# Altium PCB BMS.PcbDoc
Units mm, origin at the board's own origin, x right, y up, seen from the top; angles counter-clockwise.
Board outline 112.5 x 100 mm, 2 copper layers (Top Layer, Bottom Layer), stack 1.671 mm thick; 67 components, 54 nets, 239 pads, 0 vias.
Unrouted connection lines stored in the file: 137.
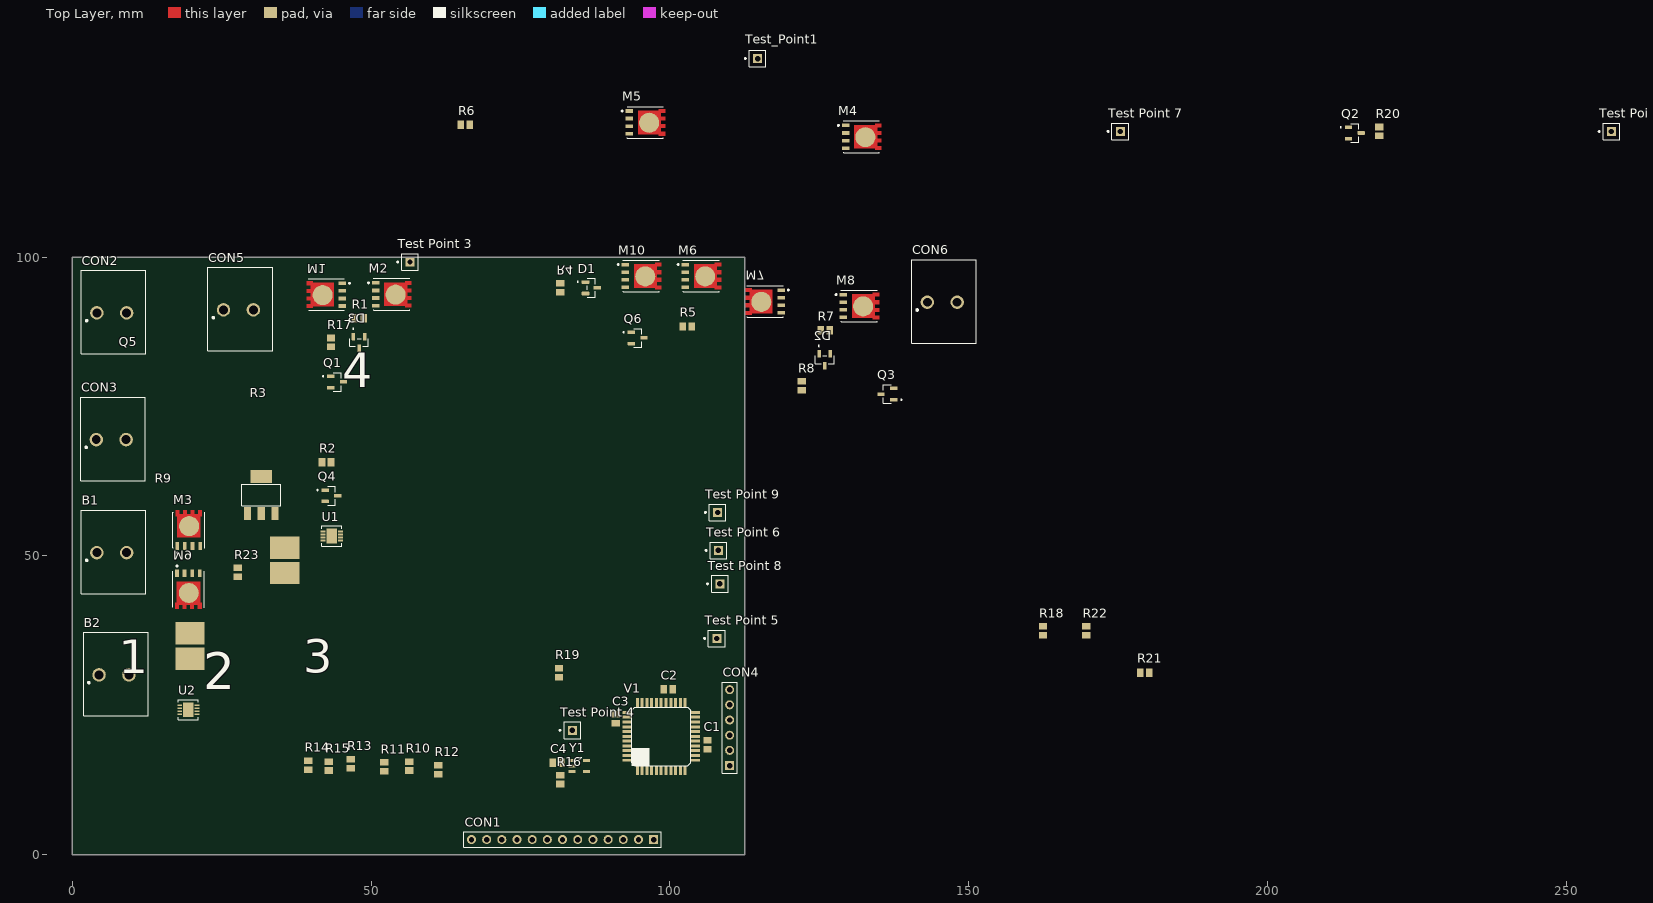
[diagram p0: Top Layer view]
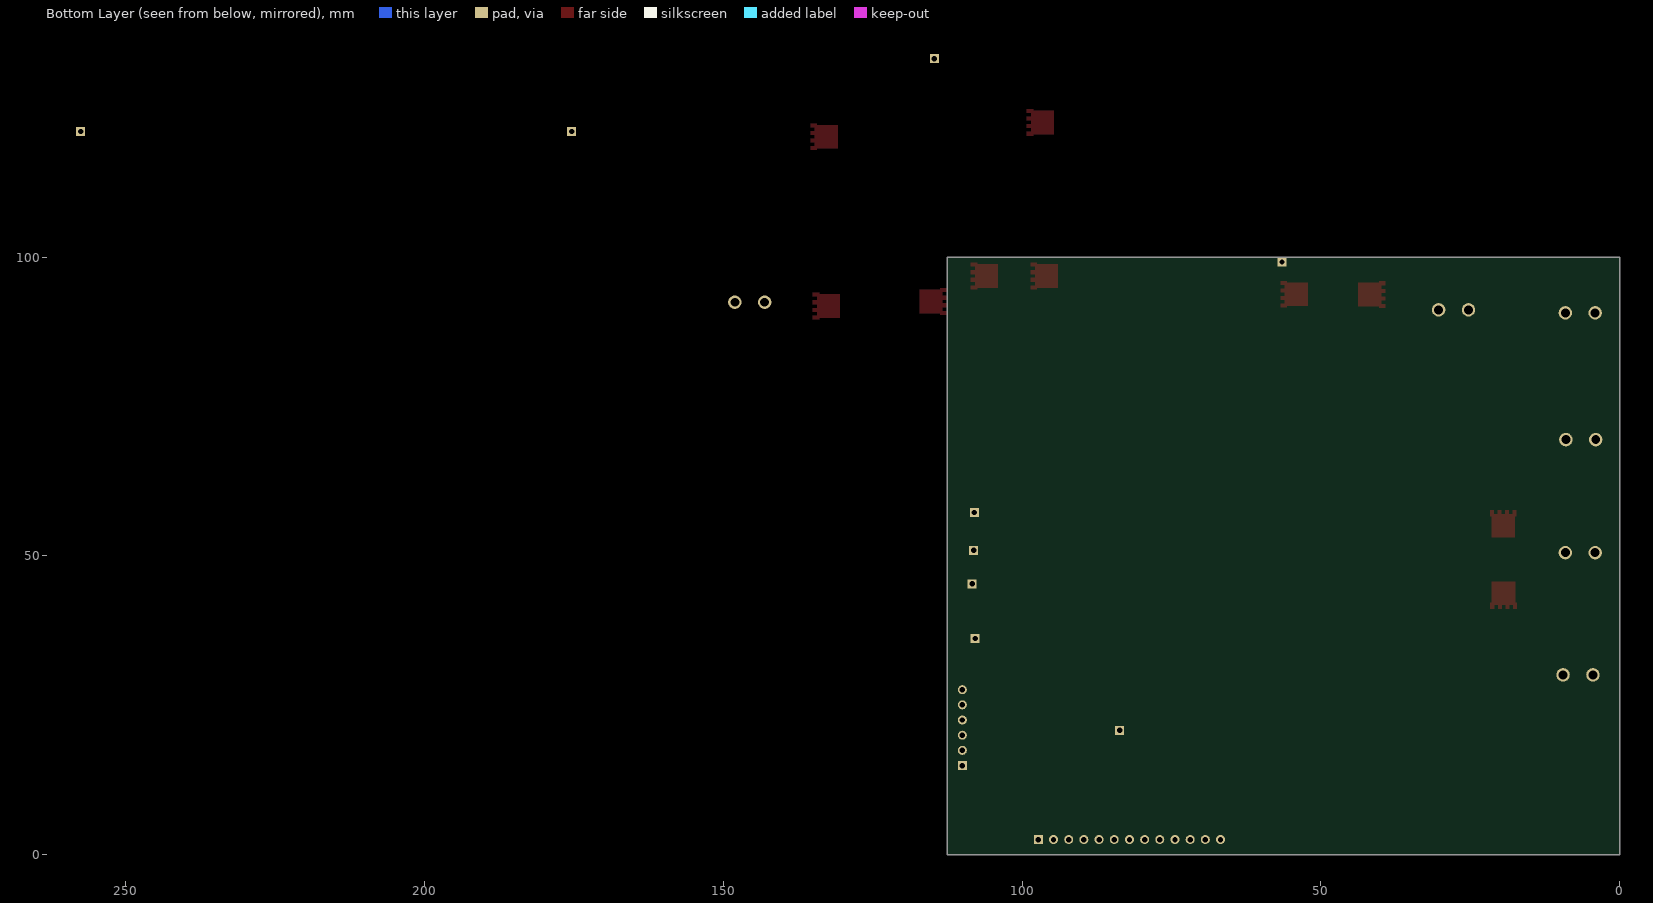
[diagram p1: Bottom Layer view, seen from below]

## Layer stack, top to bottom
Top Solder: solder mask 0.0102, Solder Resist, Dk 3.5
Top Layer: signal copper 0.0356
Dielectric 1: dielectric 1.6, FR-4, Dk 4.8
Bottom Layer: signal copper 0.0356
Bottom Solder: solder mask 0.0102, Solder Resist, Dk 3.5

## Board outline
0,0 112.5,0 112.5,100 0,100

## Design rules (kind name [scope] priority, off if disabled: settings)
Clearance [All] p1: gap=0.125 ignorepadtopadclearanceinfootprint=FALSE except(0: Arc-Hole Track-Hole SMDPad-Hole THPad-Hole Via-Hole Fill-Hole Poly-Hole Region-Hole Text-Hole)
DiffPairsRouting [All] p1: maxlimit=10 minlimit=0.125 mostfreqgap=0.15 toplayer_minwidth=0.381 toplayer_maxwidth=0.381 toplayer_prefwidth=0.381 bottomlayer_minwidth=0.381 bottomlayer_maxwidth=0.381 bottomlayer_prefwidth=0.381 maxuncoupledlength=12.7
FabricationTestPointUsage FabricationTestPointUsage_1 [All] p1: valid=0 allowmultiple=FALSE
FabricationTestpoint FabricationTestpoint_1 [All] p1: side=3 testpointundercomponent=TRUE minsize=1.016 maxsize=2.54 preferedsize=1.524 minholesize=0 maxholesize=1.016 preferedholesize=0.813 testpointgrid=0.025 allowsidetop=TRUE allowsidebottom=TRUE usegrid=TRUE gridtolerance=0
HoleSize [All] p1: absolutevalues=TRUE maxlimit=6 minlimit=0.2 maxpercent=80.000 minpercent=20.000
HoleSize FabricationTestpoint [All] p2 off: absolutevalues=TRUE maxlimit=2.54 minlimit=0.025 maxpercent=80.000 minpercent=20.000
HoleSize FabricationTestPointUsage [All] p3 off: absolutevalues=TRUE maxlimit=2.54 minlimit=0.025 maxpercent=80.000 minpercent=20.000
PlaneClearance [All] p1: clearance=0.5
PlaneConnect [All] p1: planeconnectstyle=Relief reliefexpansion=0.4 reliefentries=4 reliefconductorwidth=0.15 reliefairgap=0.15
PolygonConnect [All] p1: connectstyle=Relief reliefconductorwidth=0.15 reliefentries=4 polygonreliefangle="90 Angle" airgapwidth=0.254
RoomDefinition "Switch and batteries" [InComponentClass('Switch and batteries')] p1: confinementstyle=ConfineIn formatcopy=TRUE lockcomponents=FALSE outline -24.892,-25.908 25.908,-25.908 25.908,-0.508 -24.892,-0.508
RoomDefinition "Gauges and measure" [InComponentClass('Gauges and measure')] p2: confinementstyle=ConfineIn formatcopy=TRUE lockcomponents=FALSE outline -24.892,-25.908 25.908,-25.908 25.908,-0.508 -24.892,-0.508
RoomDefinition Designator [InComponentClass('Designator')] p3: confinementstyle=ConfineIn formatcopy=TRUE lockcomponents=FALSE outline -24.892,-25.908 25.908,-25.908 25.908,-0.508 -24.892,-0.508
RoomDefinition CPLD [InComponentClass('CPLD')] p4: confinementstyle=ConfineIn formatcopy=TRUE lockcomponents=FALSE outline -24.892,-25.908 25.908,-25.908 25.908,-0.508 -24.892,-0.508
RoutingCorners [All] p1: cornerstyle=45-Degree minsetback=1.25 maxsetback=1.25
RoutingVias [All] p1: holewidth=0.3 width=0.6 viastyle="Through Hole" minholewidth=0.2 minwidth=0.45 maxholewidth=0.45 maxwidth=0.75
SolderMaskExpansion [All] p1: expansion=0.075 istentingtop=FALSE
Width [All] p1: maxlimit=10 minlimit=0.125 preferedwidth=0.15
23 further rules are at their usual default settings.

## Classes and differential pairs
component class "Switch and batteries": B1 B2 CON5 CON6 D1 D2 D3 M1 M2 M3 M4 M5 M6 M7 M8 M9 M10 Q1 Q2 Q3 Q4 Q5 Q6 R1 R2 R3 R4 R5 R6 R7 R8 R9 R17 R18 R19 R20 R21 R22 R23 "Test Point 2" "Test Point 3" "Test Point 5" "Test Point 6" "Test Point 7" "Test Point 8" "Test Point 9" Test_Point1
component class "Gauges and measure": R10 R11 R12 R13 R14 R15 U1 U2
component class Designator: CON1 CON2 CON3
component class CPLD: C1 C2 C3 C4 CON4 R16 "Test Point 4" V1 Y1

## Components (designator, comment, footprint, x,y, rotation, side; value= is the part's Value field where it differs from the comment)
B1 "Bornier_1" Block_2Position 6.731,50.673 r0 top
B2 "Bornier_1" Block_2Position 7.112,30.226 r0 top
C1 "Cap_0.1u" C0805 106.304,18.415 r90 top value=0.1uF
C2 "Cap_0.1u" C0805 99.712,27.686 r0 top value=0.1uF
C3 "Cap_0.1u" C0805 90.937,22.733 r90 top value=0.1uF
C4 "Cap_0.1u" C0805 81.158,15.367 r0 top value=0.1uF
CON1 "Header 13" HDR1X13 97.287,2.54 r180 top
CON2 "Bornier_1" Block_2Position 6.731,90.805 r0 top
CON3 "Bornier_1" Block_2Position 6.644,69.596 r0 top
CON4 "Header 6" HDR1X6 110,14.92 r90 top
CON5 "Bornier_1" Block_2Position 27.94,91.313 r0 top
CON6 "Bornier_1" Block_2Position 145.709,92.583 r0 top
D1 "D Zener" SOT95P230X110-3N_ZENER#1 86.868,94.869 r0 top
D2 "D Zener" SOT95P230X110-3N_ZENER#2 125.923,82.84 r270 top
D3 "D Zener" SOT95P230X110-3N_ZENER#2 48.006,85.725 r270 top
M1 "MOSFET-P" Vishay_S17-0173-SINGLE_MFG#1 42.545,93.726 r180 top
M2 "MOSFET-P" Vishay_S17-0173-SINGLE_MFG#2 53.452,93.795 r0 top
M3 "MOSFET-N" Vishay_S17-0173-SINGLE_MFG#2 19.489,54.341 r90 top
M4 "MOSFET-P" Vishay_S17-0173-SINGLE_MFG#2 132.08,120.142 r0 top
M5 "MOSFET-P" Vishay_S17-0173-SINGLE_MFG#2 95.888,122.555 r0 top
M6 "MOSFET-P" Vishay_S17-0173-SINGLE_MFG#2 105.268,96.843 r0 top
M7 "MOSFET-P" Vishay_S17-0173-SINGLE_MFG#1 115.951,92.583 r180 top
M8 "MOSFET-P" Vishay_S17-0173-SINGLE_MFG#2 131.699,91.821 r0 top
M9 "MOSFET-N" Vishay_S17-0173-SINGLE_MFG#1 19.431,44.447 r270 top
M10 "MOSFET-P" Vishay_S17-0173-SINGLE_MFG#2 95.235,96.843 r0 top
Q1 "NPN" SOT95P237X111-3N_NPN 44.323,79.121 r0 top
Q2 "NPN" SOT95P237X111-3N_NPN 214.63,120.777 r0 top
Q3 "NPN" SOT95P237X111-3N_NPN 136.398,77.089 r180 top
Q4 "NPN" SOT95P237X111-3N_NPN 43.39,60.071 r0 top
Q5 "PNP" SOT230P700X180-4N 31.623,60.198 r0 top
Q6 "NPN" SOT95P237X111-3N_NPN 94.615,86.487 r0 top
R1 "Res_100k" C0805 48.018,89.789 r0 top
R2 "Res_2k" C0805 42.545,65.659 r180 top
R3 "Res_5m" RES_WSHM2818_VIS-M 35.56,49.276 r90 top
R4 "Res_2k" C0805 81.661,94.857 r270 top
R5 "Res_100k" C0805 102.882,88.392 r0 top
R6 "Res_100k" C0805 65.786,122.174 r0 top
R7 "Res_100k" C0805 125.984,87.757 r0 top
R8 "Res_100k" C0805 122.047,78.486 r90 top
R9 "Res_5m" RES_WSHM2818_VIS-M 19.685,34.925 r90 top
R10 "Res_2k" C0805 56.393,14.847 r90 top
R11 "Res_2k" C0805 52.202,14.732 r90 top
R12 "Res_2k" C0805 61.219,14.224 r90 top
R13 "Res_2k" C0805 46.614,15.24 r90 top
R14 "Res_2k" C0805 39.502,14.974 r90 top
R15 "Res_2k" C0805 42.931,14.847 r90 top
R16 "Res_60k" C0805 81.666,12.585 r90 top
R17 "Res_100k" C0805 43.307,85.725 r90 top
R18 "Res_10k" C0805 162.433,37.465 r90 top
R19 "Res_10k" C0805 81.457,30.468 r90 top
R20 "Res_10k" C0805 218.694,121.031 r90 top
R21 "Res_10k" C0805 179.451,30.48 r0 top
R22 "Res_10k" C0805 169.672,37.453 r90 top
R23 "Res_10k" C0805 27.686,47.256 r270 top
"Test Point 2" "Header_1" PIN1 257.556,121.031 r90 top
"Test Point 3" "Header_1" PIN1 56.515,99.187 r90 top
"Test Point 4" "Header_1" PIN1 83.698,20.828 r90 top
"Test Point 5" "Header_1" PIN1 107.868,36.195 r90 top
"Test Point 6" "Header_1" PIN1 108.122,50.927 r90 top
"Test Point 7" "Header_1" PIN1 175.387,121.031 r90 top
"Test Point 8" "Header_1" PIN1 108.376,45.339 r90 top
"Test Point 9" "Header_1" PIN1 107.995,57.277 r90 top
Test_Point1 "Header_1" PIN1 114.681,133.223 r90 top
U1 "LTC2944" DFN-8_DD_Gauges 43.434,53.34 r0 top
U2 "LTC2944" DFN-8_DD_Gauges 19.431,24.257 r0 top
V1 "XC9572XL-10VQG44C" VQFP-44_CPLD 98.557,19.812 r0 top
Y1 "OSCILLATEUR_LTC6900CS5TRMPBF" SOT95P280X100-5N_OSC 84.841,14.859 r0 top

## Footprints (in the part's own frame and the unit in brackets; to place one, negate y for a bottom-side part, rotate by r counter-clockwise, add the part's x,y. Pads: shape width x height; smd on the part's side, far side on the other; paste and mask are expansions set on the pad)
Block_2Position [mm]
  round 2.25 hole 1.5: 1(-2.627,-0.127) 2(2.373,-0.127)
  silkscreen extent -5.23,-7 5.57,7, body extent -5.23,-7 5.57,7, height 16
C0805 [mm] "Chip Capacitor, Body 2.0x1.3mm, IPC High Density"
  rect 1.1x1.4 smd: 1(-0.75,0) 2(0.75,0)
  body extent -1.1,-0.72 1.1,0.72, height 1.4
DFN-8_DD_Gauges [mil]
  rect 31x12 smd: 1(-57.5,29.53) 2(-57.5,9.84) 3(-57.5,-9.84) 4(-57.5,-29.53) 5(57.5,-29.53) 6(57.5,-9.84) 7(57.5,9.84) 8(57.5,29.53)
  rect 69x98 smd paste-78.74: 9(0,0)
  silkscreen extent -66,-66 66,66, body extent -59,-59 59,59, height 31
HDR1X6 [mm] "Connector; Header; 6 Position"
  rect 1.5x1.5 hole 0.9: 1(0,0)
  round 1.5 hole 0.9: 2(2.54,0) 3(5.08,0) 4(7.62,0) 5(10.16,0) 6(12.7,0)
  silkscreen extent -1.27,-1.27 13.97,1.27
HDR1X13 [mm] "Connector; Header; 13 Position"
  rect 1.5x1.5 hole 0.9: 1(0,0)
  round 1.5 hole 0.9: 2(2.54,0) 3(5.08,0) 4(7.62,0) 5(10.16,0) 6(12.7,0) 7(15.24,0) 8(17.78,0) 9(20.32,0) 10(22.86,0) 11(25.4,0) 12(27.94,0) 13(30.48,0)
  silkscreen extent -1.27,-1.27 31.75,1.27
PIN1 [mm] "Connector; Plug"
  rect 1.5x1.5 hole 0.9: 1(0,0)
  silkscreen extent -1.4,-1.4 1.4,2.17
RES_WSHM2818_VIS-M [mil]
  rect 147x192 smd paste+0 mask+0: 1(-83.5,0) 2(83.5,0)
  body extent 0,0 10,10, height 10
SOT95P230X110-3N_ZENER#1 [mm]
  rrect25% 1.26x0.59 smd: 1(-0.98,0.95) 2(-0.98,-0.95) 3(0.98,0)
  silkscreen extent -2.4,-1.56 0.65,1.56, body extent -1.15,-1.45 1.15,1.45, height 1.1
SOT95P230X110-3N_ZENER#2 [mm]
  rrect25% 1.26x0.59 smd: 1(-0.98,-0.95) 2(-0.98,0.95) 3(0.98,0)
  silkscreen extent -2.4,-1.56 0.65,1.56, body extent -1.15,-1.45 1.15,1.45
SOT95P237X111-3N_NPN [mm]
  rrect25% 1.23x0.6 smd: 1(-1.06,0.95) 2(-1.06,-0.95) 3(1.06,0)
  silkscreen extent -2.46,-1.56 0.65,1.56
SOT95P280X100-5N_OSC [mil]
  rect 48x20 smd: 1(-48,37) 2(-48,0) 3(-48,-37) 4(48,-37) 5(48,37)
  silkscreen extent -16,45 16,57
SOT230P700X180-4N [mil]
  rect 48x88 smd: 1(-91,-122) 2(0,-122) 3(91,-122)
  rect 141.73x86.61 smd: 4(0,122.01)
  silkscreen extent -129,-70 129,70
Vishay_S17-0173-SINGLE_MFG#1 [mm]
  rect 1.27x0.61 smd paste+0 mask+0: 1(-2.67,-1.905) 2(-2.67,-0.635) 3(-2.67,0.635) 4(-2.67,1.905)
  round 3.356 smd paste+0 mask+0: 5-6-7-8(0.65,0.069)
  Top Layer region: -1.215,-1.955 2.285,-1.955 2.285,-2.21 3.305,-2.21 3.305,-1.6 2.595,-1.6 2.595,-0.94 3.305,-0.94 3.305,-0.33 2.595,-0.33 2.595,0.33 3.305,0.33 3.305,0.94 2.595,0.94 2.595,1.6 3.305,1.6 3.305,2.21 2.285,2.21 2.285,1.955 -1.215,1.955
  silkscreen extent -4,-2.65 3,2.65, body extent -3.07,-2.58 3.07,2.57, height 1.12
Vishay_S17-0173-SINGLE_MFG#2 [mm]
  rect 1.27x0.61 smd paste+0 mask+0: 1(-2.67,1.905) 2(-2.67,0.635) 3(-2.67,-0.635) 4(-2.67,-1.905)
  round 3.356 smd paste+0 mask+0: 5-6-7-8(0.65,-0.069)
  Top Layer region: -1.215,1.955 2.285,1.955 2.285,2.21 3.305,2.21 3.305,1.6 2.595,1.6 2.595,0.94 3.305,0.94 3.305,0.33 2.595,0.33 2.595,-0.33 3.305,-0.33 3.305,-0.94 2.595,-0.94 2.595,-1.6 3.305,-1.6 3.305,-2.21 2.285,-2.21 2.285,-1.955 -1.215,-1.955
  silkscreen extent -3.99,-2.65 3,2.65, body extent -3.4,-2.73 3.4,2.73, height 0.25
VQFP-44_CPLD [mm] "CPLD"
  rect 0.5x1.5 smd: 1(-4,-5.7) 2(-3.2,-5.7) 3(-2.4,-5.7) 4(-1.6,-5.7) 5(-0.8,-5.7) 6(0,-5.7) 7(0.8,-5.7) 8(1.6,-5.7) 9(2.4,-5.7) 10(3.2,-5.7) 11(4,-5.7) 23(4,5.7) 24(3.2,5.7) 25(2.4,5.7) 26(1.6,5.7) 27(0.8,5.7) 28(0,5.7) 29(-0.8,5.7) 30(-1.6,5.7) 31(-2.4,5.7) 32(-3.2,5.7) 33(-4,5.7)
  rect 1.5x0.5 smd: 12(5.7,-4) 13(5.7,-3.2) 14(5.7,-2.4) 15(5.7,-1.6) 16(5.7,-0.8) 17(5.7,0) 18(5.7,0.8) 19(5.7,1.6) 20(5.7,2.4) 21(5.7,3.2) 22(5.7,4) 34(-5.7,4) 35(-5.7,3.2) 36(-5.7,2.4) 37(-5.7,1.6) 38(-5.7,0.8) 39(-5.7,0) 40(-5.7,-0.8) 41(-5.7,-1.6) 42(-5.7,-2.4) 43(-5.7,-3.2) 44(-5.7,-4)
  silkscreen extent -4.9,-4.9 4.9,4.9

## Part data
B1 B2 CON2 CON3 CON5 CON6: "Bornier à vis"
C1 C2 C3 C4: "Capacitor", LatestRevisionDate=17-Jul-2002, LatestRevisionNote="Re-released for DXP Platform.", PackageDescription="Radial Cap, Thru-Hole; 2 Leads; 0.3 in Pin Spacing", PackageReference=RAD-0.3, Published=8-Jun-2000, Publisher="Altium Limited"
CON1: "Header, 13-Pin", LatestRevisionDate=17-Jul-2002, LatestRevisionNote="Re-released for DXP Platform.", Publisher="Altium Limited"
CON4: "Header, 6-Pin", LatestRevisionDate=17-Jul-2002, LatestRevisionNote="Re-released for DXP Platform.", Publisher="Altium Limited"
D1 D2 D3: "Zener Diode", LatestRevisionDate=17-Jul-2002, LatestRevisionNote="Re-released for DXP Platform.", PackageDescription="Diode, Thru-Hole; 2 Leads; 0.7 in Pin Spacing", PackageReference=DIODE-0.7, Published=8-Jun-2000, Publisher="Altium Limited"
M1 M2 M4 M5 M6 M7 M8 M10: "P-Channel MOSFET", LatestRevisionDate=17-Jul-2002, LatestRevisionNote="Re-released for DXP Platform.", PackageDescription="TO, Flat Index; 3 In-Line, Axial Leads; Body Dia. 4.6mm; Lead Dia. 0.5 mm (max)", PackageReference=E3, PackageVersion=1995/1996, Published=8-Jun-2000, Publisher="Altium Limited"
M3 M9: "N-Channel MOSFET", LatestRevisionDate=17-Jul-2002, LatestRevisionNote="Re-released for DXP Platform.", PackageDescription="TO, Flat Index; 3 In-Line, Axial Leads; Body Dia. 4.6mm; Lead Dia. 0.5 mm (max)", PackageReference=E3, PackageVersion=1995/1996, Published=8-Jun-2000, Publisher="Altium Limited"
Q1 Q2 Q3 Q4 Q6: "NPN Bipolar Transistor", Code_JEDEC=TO-226-AA, LatestRevisionDate=17-Jul-2002, LatestRevisionNote="Re-released for DXP Platform.", PackageDescription="TO, Flat Index; 3 In-Line, Axial Leads; Body Dia. 4.8mm; Leads 0.55 x 0.51 mm (max)", PackageReference=TO-226-AA, Published=8-Jun-2000, Publisher="Altium Limited"
Q5: "PNP Bipolar Transistor", LatestRevisionDate=29-May-2009, LatestRevisionNote="IPC-7351 Footprint Added.", PackageDescription="3-Pin SOT-23 Package 0.95 mm Pitch, 2.4 mm Lead Span", PackageReference=SOT-23B, PackageVersion=Aug-1999, Published=8-Jun-2000, Publisher="Altium Limited"
R1 R2 R3 R4 R5 R6 R7 R8 R9 R10 R11 R12 R13 R14 R15 R16 R17 R18 R19 R20 R21 R22 R23: "Resistor"
"Test Point 2" "Test Point 3" "Test Point 4" "Test Point 5" "Test Point 6" "Test Point 7" "Test Point 8" "Test Point 9" Test_Point1: "Header 1-pin"
U1 U2: "Gas gauge"
V1: "IC CPLD 72MC 10NS 44VQFP", Package="VQFP-44 Xilinx", Availability=Warning, Check_prices=https://www.snapeda.com/parts/XC9572XL-10VQG44C/Xilinx%20Inc./view-part/51416/?ref=eda, MF="Xilinx Inc.", MP=XC9572XL-10VQG44C, Price=None, Purchase-URL=https://pricing.snapeda.com/search/part/XC9572XL-10VQG44C/?ref=eda, SnapEDA_Link=https://www.snapeda.com/parts/XC9572XL-10VQG44C/Xilinx%20Inc./view-part/51416/?ref=snap
Y1: "Low Power, 1kHz to 20MHz Resistor Set SOT-23 Oscillator", Package=None, Availability=Unavailable, MP=LTC6900CS5TRMPBF, Price=None

## Nets (pads, with @x,y where several pads share a name; then routed paths per layer and width w, separated by ;. In a path a pad name is that pad's centre, name@x,y a point inside that pad or via, vN(x,y) a via of type N, cw(c..) or ccw(c..) an arc to the next point about the centre after c; other vN are vias at no path point)
+3V3: CON3.1 R10.2 R11.2 R12.2 R13.2 R14.2 R15.2
+5: C1.2 C2.2 C3.2 C4.2 CON2.1 CON4.6 R16.2 V1.15 V1.26 V1.35 Y1.1 Y1.4
GND: B2.2 C1.1 C2.1 C3.1 C4.1 CON2.2 CON3.2 CON4.5 CON5.2 CON6.2 M9.1 Q1.3 Q2.3 Q3.3 Q4.3 Q6.3 U1.2 U1.3 U1.7 U2.2 U2.3 U2.7 V1.4 V1.17 V1.25 Y1.2
NetB1_1: B1.1 Q5.3 R3.1 U1.8
NetB1_2: B1.2 M3.1 M4.1
NetB2_1: "Test Point 2.1" B2.1 R9.1 U2.8
NetCON1_1: CON1.1 V1.3
NetCON1_2: CON1.2 V1.1
NetCON1_3: CON1.3 V1.39
NetCON1_4: CON1.4 V1.40
NetCON1_5: CON1.5 V1.41
NetCON1_6: CON1.6 V1.42
NetCON1_7: CON1.7 V1.38
NetCON1_8: CON1.8 R12.1 U1.4
NetCON1_9: CON1.9 R10.1 U1.6
NetCON1_10: CON1.10 R11.1
NetCON1_11: CON1.11 R13.1 U2.6
NetCON1_12: CON1.12 R15.1 U2.4
NetCON1_13: CON1.13 R14.1 U2.5
NetCON4_1: CON4.1 V1.10
NetCON4_2: CON4.2 V1.9
NetCON4_3: CON4.3 V1.24
NetCON4_4: CON4.4 V1.11
NetCON5_1: CON5.1 M1.1
NetCON6_1: CON6.1 M8.1
NetD1_1: D1.1 M6.2 M10.2 R4.1 R5.2
NetD1_2: D1.2 M6.3 M10.3 R4.2
NetD2_1: D2.1 M7.2 M8.2 R7.1 R8.2
NetD2_2: D2.2 M7.3 M8.3 R7.2
NetD3_1: D3.1 M1.2 M2.2 R1.1 R17.2
NetD3_2: D3.2 M1.3 M2.3 R1.2
NetM2_1: "Test Point 3.1" M2.1 M6.1 M7.1 R3.2 Test_Point1.1 U1.1
NetM3_2: M3.2 M9.2 Q5.1 R23.1
NetM3_3: M3.3 M9.3 R23.2
NetM4_2: M4.2 M5.2 Q2.1 R6.1
NetM4_3: M4.3 M5.3 R6.2
NetM5_1: M5.1 M10.1 R9.2 U2.1
NetQ1_1: Q1.1 R17.1
NetQ1_2: Q1.2 R18.2
NetQ2_2: Q2.2 R20.2
NetQ3_1: Q3.1 R8.1
NetQ3_2: Q3.2 R22.2
NetQ4_1: Q4.1 R2.1
NetQ4_2: Q4.2 R19.2
NetQ5_2: Q5.2 R2.2
NetQ6_1: Q6.1 R5.1
NetQ6_2: "Test Point 8.1" Q6.2 R21.2
NetR16_1: R16.1 Y1.3
NetR18_1: "Test Point 6.1" R18.1 V1.22
NetR19_1: "Test Point 5.1" R19.1 V1.19
NetR20_1: "Test Point 7.1" R20.1 V1.20
NetR21_1: R21.1 V1.21
NetR22_1: "Test Point 9.1" R22.1 V1.23
out_osc: "Test Point 4.1" V1.44 Y1.5
pads on no net: D1.3 D2.3 D3.3 M1.4 M1.5-6-7-8 M2.4 M2.5-6-7-8 M3.4 M3.5-6-7-8 M4.4 M4.5-6-7-8 M5.4 M5.5-6-7-8 M6.4 M6.5-6-7-8 M7.4 M7.5-6-7-8 M8.4 M8.5-6-7-8 M9.4 M9.5-6-7-8 M10.4 M10.5-6-7-8 Q5.4 U1.5 U1.9 U2.9 V1.2 V1.5 V1.6 V1.7 V1.8 V1.12 V1.13 V1.14 V1.16 V1.18 V1.27 V1.28 V1.29 V1.30 V1.31 V1.32 V1.33 V1.34 V1.36 V1.37 V1.43

## Text inside footprints (layer, text, board x,y; h text height)
Q5: Top Overlay "3" at 38.66,30.433 h5.6; Top Overlay "4" at 45.174,78.267 h5.78; Top Overlay "1" at 7.757,30.346 h5.62; Top Overlay "2" at 21.931,27.7 h6.1
R3: Mechanical 7 "0.135in/3.429mm" at 41.656,48.863 h0.64 r90; Mechanical 7 "0.29in/7.366mm" at 30.099,47.053 h0.64 r90; Mechanical 7 "0.19in/4.826mm" at 35.877,56.007 h0.64 r90; Mechanical 7 "Alt 2 Padstyle: OX90Y60D30P" at 47.904,40.703 h1.27 r90; Mechanical 7 "Alt 1 Padstyle: OX60Y90D30P" at 46.38,40.703 h1.27 r90; Mechanical 7 "Default Padstyle: RX147Y192D0T" at 44.856,39.751 h1.27 r90
R9: Mechanical 7 "0.135in/3.429mm" at 25.781,34.512 h0.64 r90; Mechanical 7 "0.29in/7.366mm" at 14.224,32.703 h0.64 r90; Mechanical 7 "0.19in/4.826mm" at 20.002,41.656 h0.64 r90; Mechanical 7 "Alt 2 Padstyle: OX90Y60D30P" at 32.029,26.352 h1.27 r90; Mechanical 7 "Alt 1 Padstyle: OX60Y90D30P" at 30.505,26.352 h1.27 r90; Mechanical 7 "Default Padstyle: RX147Y192D0T" at 28.981,25.4 h1.27 r90